# Altium PCB TFT_Adapter_Board_拼版.PcbDoc (part 5 of 9)
Units mm, origin at the board's own origin, x right, y up, seen from the top; angles counter-clockwise.
Board outline 137 x 166.56 mm, 2 copper layers (Top Layer, Bottom Layer); 80 components, 32 nets, 2615 pads, 0 vias.
Unrouted connection lines stored in the file: 1248.
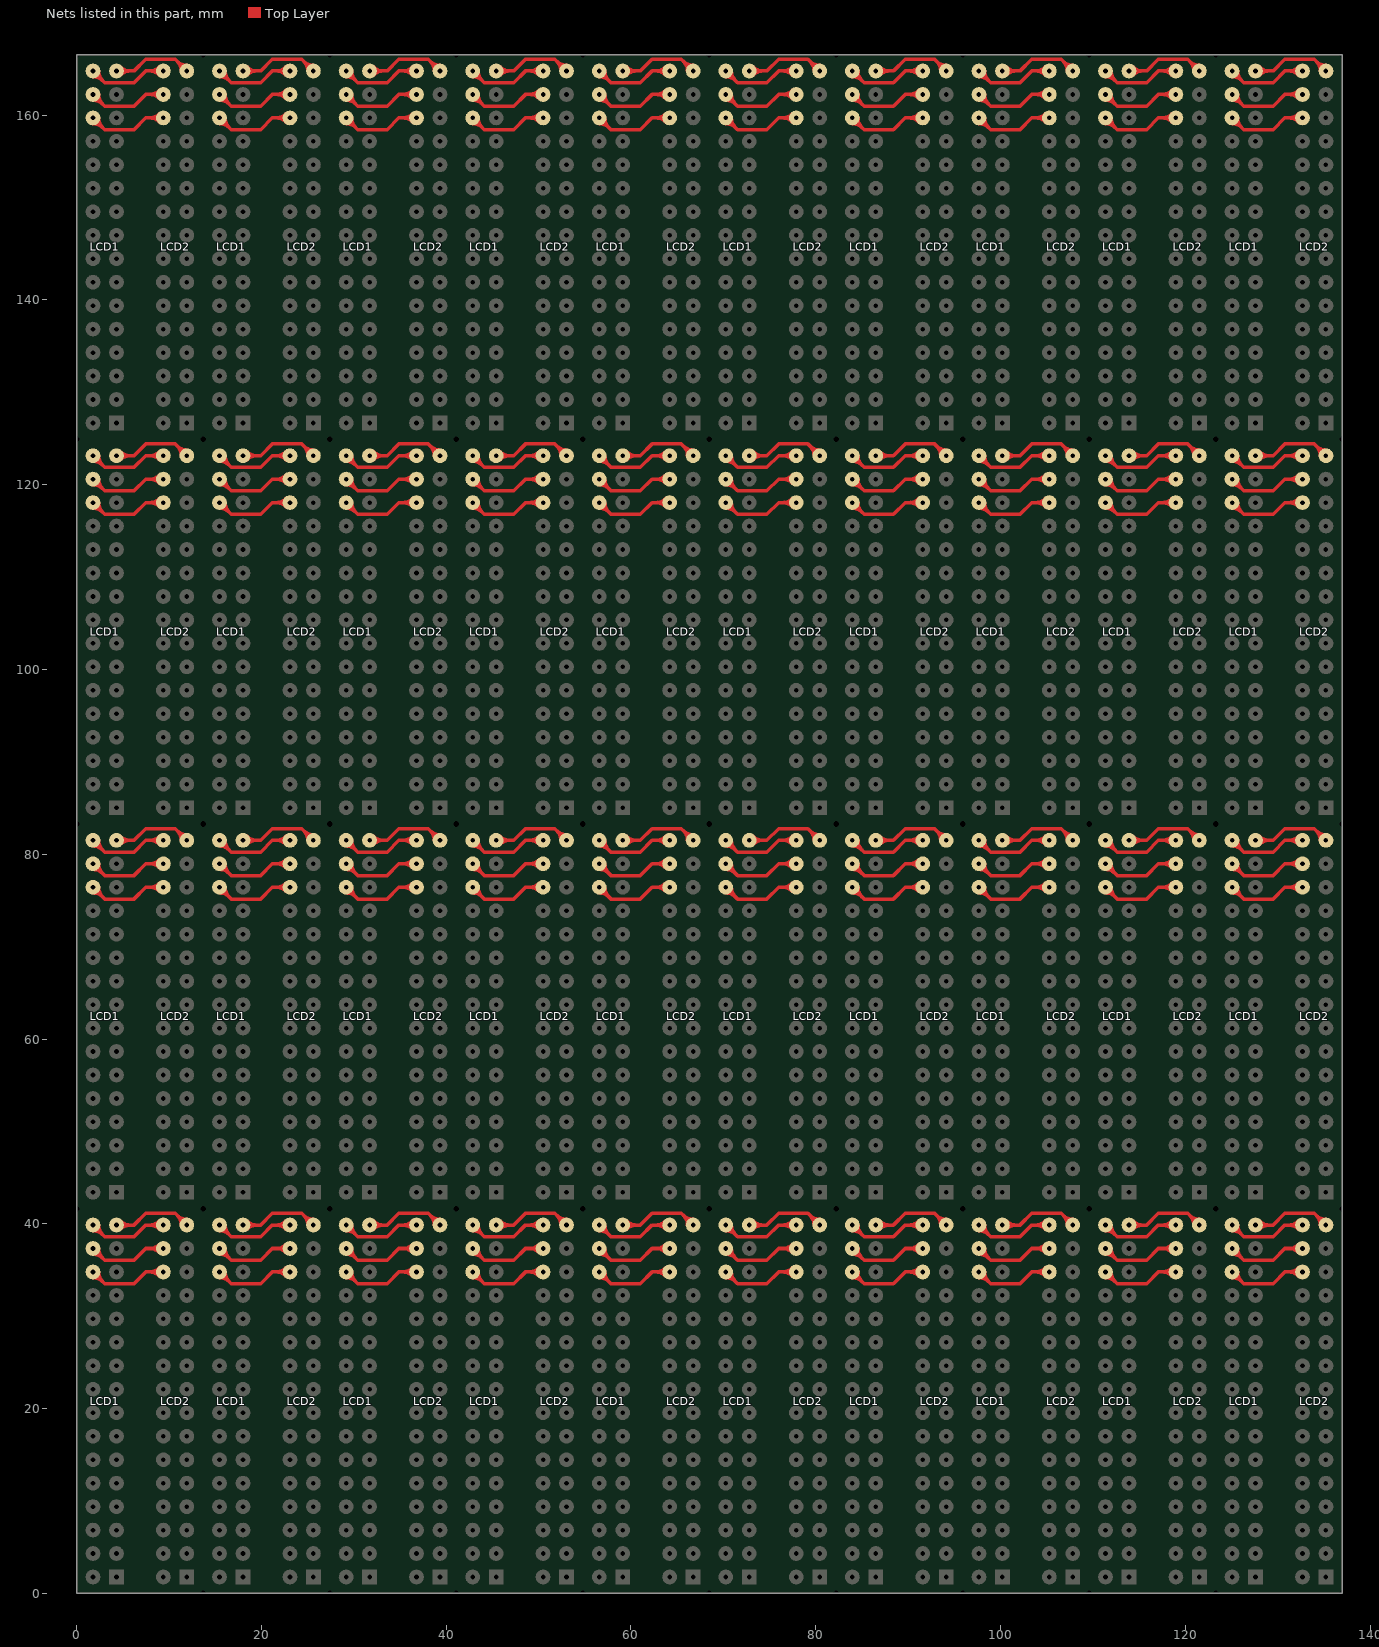
[diagram p5: the nets of this part, all layers, seen from the top]

## Nets (pads, with @x,y where several pads share a name; then routed paths per layer and width w, separated by ;. In a path a pad name is that pad's centre, name@x,y a point inside that pad or via, vN(x,y) a via of type N, cw(c..) or ccw(c..) an arc to the next point about the centre after c; other vN are vias at no path point) (continued)
NetLCD1_16: LCD1.16 LCD2.16 | length 531.8
  Top Layer w0.381: LCD1.16@4.31,39.87 6.215,39.87 7.485,41.14 10.66,41.14 LCD2.16@11.93,39.87 ; LCD1.16@4.31,81.51 6.215,81.51 7.485,82.78 10.66,82.78 LCD2.16@11.93,81.51 ; LCD1.16@4.31,123.15 6.215,123.15 7.485,124.42 10.66,124.42 LCD2.16@11.93,123.15 ; LCD1.16@4.31,164.79 6.215,164.79 7.485,166.06 10.66,166.06 LCD2.16@11.93,164.79 ; LCD1.16@4.741,39.439 cw(c5.781,38.399) 5.781,39.87 cw(c5.781,41.341) LCD1.16@4.741,40.301 ; LCD1.16@4.741,81.079 cw(c5.781,80.039) 5.781,81.51 cw(c5.781,82.981) LCD1.16@4.741,81.941 ; LCD1.16@4.741,122.719 cw(c5.781,121.679) 5.781,123.15 cw(c5.781,124.621) LCD1.16@4.741,123.581 ; LCD1.16@4.741,164.359 cw(c5.781,163.319) 5.781,164.79 cw(c5.781,166.261) LCD1.16@4.741,165.221 ; LCD2.16@11.321,39.87 ccw(c9.849,39.87) 10.89,40.91 ccw(c11.93,41.951) LCD2.16@11.93,40.479 ; LCD2.16@11.321,81.51 ccw(c9.849,81.51) 10.89,82.55 ccw(c11.93,83.591) LCD2.16@11.93,82.119 ; LCD2.16@11.321,123.15 ccw(c9.849,123.15) 10.89,124.19 ccw(c11.93,125.231) LCD2.16@11.93,123.759 ; LCD2.16@11.321,164.79 ccw(c9.849,164.79) 10.89,165.83 ccw(c11.93,166.871) LCD2.16@11.93,165.399 ; LCD1.16@18.01,39.87 19.915,39.87 21.185,41.14 24.36,41.14 LCD2.16@25.63,39.87 ; LCD1.16@18.01,81.51 19.915,81.51 21.185,82.78 24.36,82.78 LCD2.16@25.63,81.51 ; LCD1.16@18.01,123.15 19.915,123.15 21.185,124.42 24.36,124.42 LCD2.16@25.63,123.15 ; LCD1.16@18.01,164.79 19.915,164.79 21.185,166.06 24.36,166.06 LCD2.16@25.63,164.79 ; LCD1.16@18.441,39.439 cw(c19.481,38.399) 19.481,39.87 cw(c19.481,41.341) LCD1.16@18.441,40.301 ; LCD1.16@18.441,81.079 cw(c19.481,80.039) 19.481,81.51 cw(c19.481,82.981) LCD1.16@18.441,81.941 ; LCD1.16@18.441,122.719 cw(c19.481,121.679) 19.481,123.15 cw(c19.481,124.621) LCD1.16@18.441,123.581 ; LCD1.16@18.441,164.359 cw(c19.481,163.319) 19.481,164.79 cw(c19.481,166.261) LCD1.16@18.441,165.221 ; LCD2.16@25.02,39.87 ccw(c23.549,39.87) 24.59,40.91 ccw(c25.63,41.951) LCD2.16@25.63,40.479 ; LCD2.16@25.02,81.51 ccw(c23.549,81.51) 24.59,82.55 ccw(c25.63,83.591) LCD2.16@25.63,82.119 ; LCD2.16@25.02,123.15 ccw(c23.549,123.15) 24.59,124.19 ccw(c25.63,125.231) LCD2.16@25.63,123.759 ; LCD2.16@25.02,164.79 ccw(c23.549,164.79) 24.59,165.83 ccw(c25.63,166.871) LCD2.16@25.63,165.399 ; LCD1.16@31.71,39.87 33.615,39.87 34.885,41.14 38.06,41.14 LCD2.16@39.33,39.87 ; LCD1.16@31.71,81.51 33.615,81.51 34.885,82.78 38.06,82.78 LCD2.16@39.33,81.51 ; LCD1.16@31.71,123.15 33.615,123.15 34.885,124.42 38.06,124.42 LCD2.16@39.33,123.15 ; LCD1.16@31.71,164.79 33.615,164.79 34.885,166.06 38.06,166.06 LCD2.16@39.33,164.79 ; LCD1.16@32.141,39.439 cw(c33.181,38.399) 33.181,39.87 cw(c33.181,41.341) LCD1.16@32.141,40.301 ; LCD1.16@32.141,81.079 cw(c33.181,80.039) 33.181,81.51 cw(c33.181,82.981) LCD1.16@32.141,81.941 ; LCD1.16@32.141,122.719 cw(c33.181,121.679) 33.181,123.15 cw(c33.181,124.621) LCD1.16@32.141,123.581 ; LCD1.16@32.141,164.359 cw(c33.181,163.319) 33.181,164.79 cw(c33.181,166.261) LCD1.16@32.141,165.221 ; LCD2.16@38.72,39.87 ccw(c37.249,39.87) 38.29,40.91 ccw(c39.33,41.951) LCD2.16@39.33,40.479 ; LCD2.16@38.72,81.51 ccw(c37.249,81.51) 38.29,82.55 ccw(c39.33,83.591) LCD2.16@39.33,82.119 ; LCD2.16@38.72,123.15 ccw(c37.249,123.15) 38.29,124.19 ccw(c39.33,125.231) LCD2.16@39.33,123.759 ; LCD2.16@38.72,164.79 ccw(c37.249,164.79) 38.29,165.83 ccw(c39.33,166.871) LCD2.16@39.33,165.399 ; LCD1.16@45.41,39.87 47.315,39.87 48.585,41.14 51.76,41.14 LCD2.16@53.03,39.87 ; LCD1.16@45.41,81.51 47.315,81.51 48.585,82.78 51.76,82.78 LCD2.16@53.03,81.51 ; LCD1.16@45.41,123.15 47.315,123.15 48.585,124.42 51.76,124.42 LCD2.16@53.03,123.15 ; LCD1.16@45.41,164.79 47.315,164.79 48.585,166.06 51.76,166.06 LCD2.16@53.03,164.79 ; LCD1.16@45.841,39.439 cw(c46.881,38.399) 46.881,39.87 cw(c46.881,41.341) LCD1.16@45.841,40.301 ; LCD1.16@45.841,81.079 cw(c46.881,80.039) 46.881,81.51 cw(c46.881,82.981) LCD1.16@45.841,81.941 ; LCD1.16@45.841,122.719 cw(c46.881,121.679) 46.881,123.15 cw(c46.881,124.621) LCD1.16@45.841,123.581 ; LCD1.16@45.841,164.359 cw(c46.881,163.319) 46.881,164.79 cw(c46.881,166.261) LCD1.16@45.841,165.221 ; LCD2.16@52.42,39.87 ccw(c50.949,39.87) 51.99,40.91 ccw(c53.03,41.951) LCD2.16@53.03,40.479 ; LCD2.16@52.42,81.51 ccw(c50.949,81.51) 51.99,82.55 ccw(c53.03,83.591) LCD2.16@53.03,82.119 ; LCD2.16@52.42,123.15 ccw(c50.949,123.15) 51.99,124.19 ccw(c53.03,125.231) LCD2.16@53.03,123.759 ; LCD2.16@52.42,164.79 ccw(c50.949,164.79) 51.99,165.83 ccw(c53.03,166.871) LCD2.16@53.03,165.399 ; LCD1.16@59.11,39.87 61.015,39.87 62.285,41.14 65.46,41.14 LCD2.16@66.73,39.87 ; LCD1.16@59.11,81.51 61.015,81.51 62.285,82.78 65.46,82.78 LCD2.16@66.73,81.51 ; LCD1.16@59.11,123.15 61.015,123.15 62.285,124.42 65.46,124.42 LCD2.16@66.73,123.15 ; LCD1.16@59.11,164.79 61.015,164.79 62.285,166.06 65.46,166.06 LCD2.16@66.73,164.79 ; LCD1.16@59.541,39.439 cw(c60.581,38.399) 60.581,39.87 cw(c60.581,41.341) LCD1.16@59.541,40.301 ; LCD1.16@59.541,81.079 cw(c60.581,80.039) 60.581,81.51 cw(c60.581,82.981) LCD1.16@59.541,81.941 ; LCD1.16@59.541,122.719 cw(c60.581,121.679) 60.581,123.15 cw(c60.581,124.621) LCD1.16@59.541,123.581 ; LCD1.16@59.541,164.359 cw(c60.581,163.319) 60.581,164.79 cw(c60.581,166.261) LCD1.16@59.541,165.221 ; LCD2.16@66.12,39.87 ccw(c64.649,39.87) 65.69,40.91 ccw(c66.73,41.951) LCD2.16@66.73,40.479 ; LCD2.16@66.12,81.51 ccw(c64.649,81.51) 65.69,82.55 ccw(c66.73,83.591) LCD2.16@66.73,82.119 ; LCD2.16@66.12,123.15 ccw(c64.649,123.15) 65.69,124.19 ccw(c66.73,125.231) LCD2.16@66.73,123.759 ; LCD2.16@66.12,164.79 ccw(c64.649,164.79) 65.69,165.83 ccw(c66.73,166.871) LCD2.16@66.73,165.399 ; LCD1.16@72.81,39.87 74.715,39.87 75.985,41.14 79.16,41.14 LCD2.16@80.43,39.87 ; LCD1.16@72.81,81.51 74.715,81.51 75.985,82.78 79.16,82.78 LCD2.16@80.43,81.51 ; LCD1.16@72.81,123.15 74.715,123.15 75.985,124.42 79.16,124.42 LCD2.16@80.43,123.15 ; LCD1.16@72.81,164.79 74.715,164.79 75.985,166.06 79.16,166.06 LCD2.16@80.43,164.79 ; LCD1.16@73.241,39.439 cw(c74.281,38.399) 74.281,39.87 cw(c74.281,41.341) LCD1.16@73.241,40.301 ; LCD1.16@73.241,81.079 cw(c74.281,80.039) 74.281,81.51 cw(c74.281,82.981) LCD1.16@73.241,81.941 ; LCD1.16@73.241,122.719 cw(c74.281,121.679) 74.281,123.15 cw(c74.281,124.621) LCD1.16@73.241,123.581 ; LCD1.16@73.241,164.359 cw(c74.281,163.319) 74.281,164.79 cw(c74.281,166.261) LCD1.16@73.241,165.221 ; LCD2.16@79.82,39.87 ccw(c78.349,39.87) 79.39,40.91 ccw(c80.43,41.951) LCD2.16@80.43,40.479 ; LCD2.16@79.82,81.51 ccw(c78.349,81.51) 79.39,82.55 ccw(c80.43,83.591) LCD2.16@80.43,82.119 ; LCD2.16@79.82,123.15 ccw(c78.349,123.15) 79.39,124.19 ccw(c80.43,125.231) LCD2.16@80.43,123.759 ; LCD2.16@79.82,164.79 ccw(c78.349,164.79) 79.39,165.83 ccw(c80.43,166.871) LCD2.16@80.43,165.399 ; LCD1.16@86.51,39.87 88.415,39.87 89.685,41.14 92.86,41.14 LCD2.16@94.13,39.87 ; LCD1.16@86.51,81.51 88.415,81.51 89.685,82.78 92.86,82.78 LCD2.16@94.13,81.51 ; LCD1.16@86.51,123.15 88.415,123.15 89.685,124.42 92.86,124.42 LCD2.16@94.13,123.15 ; LCD1.16@86.51,164.79 88.415,164.79 89.685,166.06 92.86,166.06 LCD2.16@94.13,164.79 ; LCD1.16@86.941,39.439 cw(c87.981,38.399) 87.981,39.87 cw(c87.981,41.341) LCD1.16@86.941,40.301 ; LCD1.16@86.941,81.079 cw(c87.981,80.039) 87.981,81.51 cw(c87.981,82.981) LCD1.16@86.941,81.941 ; LCD1.16@86.941,122.719 cw(c87.981,121.679) 87.981,123.15 cw(c87.981,124.621) LCD1.16@86.941,123.581 ; LCD1.16@86.941,164.359 cw(c87.981,163.319) 87.981,164.79 cw(c87.981,166.261) LCD1.16@86.941,165.221 ; LCD2.16@93.52,39.87 ccw(c92.049,39.87) 93.09,40.91 ccw(c94.13,41.951) LCD2.16@94.13,40.479 ; LCD2.16@93.52,81.51 ccw(c92.049,81.51) 93.09,82.55 ccw(c94.13,83.591) LCD2.16@94.13,82.119 ; LCD2.16@93.52,123.15 ccw(c92.049,123.15) 93.09,124.19 ccw(c94.13,125.231) LCD2.16@94.13,123.759 ; LCD2.16@93.52,164.79 ccw(c92.049,164.79) 93.09,165.83 ccw(c94.13,166.871) LCD2.16@94.13,165.399 ; LCD1.16@100.21,39.87 102.115,39.87 103.385,41.14 106.56,41.14 LCD2.16@107.83,39.87 ; LCD1.16@100.21,81.51 102.115,81.51 103.385,82.78 106.56,82.78 LCD2.16@107.83,81.51 ; LCD1.16@100.21,123.15 102.115,123.15 103.385,124.42 106.56,124.42 LCD2.16@107.83,123.15 ; LCD1.16@100.21,164.79 102.115,164.79 103.385,166.06 106.56,166.06 LCD2.16@107.83,164.79 ; LCD1.16@100.641,39.439 cw(c101.681,38.399) 101.681,39.87 cw(c101.681,41.341) LCD1.16@100.641,40.301 ; LCD1.16@100.641,81.079 cw(c101.681,80.039) 101.681,81.51 cw(c101.681,82.981) LCD1.16@100.641,81.941 ; LCD1.16@100.641,122.719 cw(c101.681,121.679) 101.681,123.15 cw(c101.681,124.621) LCD1.16@100.641,123.581 ; LCD1.16@100.641,164.359 cw(c101.681,163.319) 101.681,164.79 cw(c101.681,166.261) LCD1.16@100.641,165.221 ; LCD2.16@107.22,39.87 ccw(c105.749,39.87) 106.79,40.91 ccw(c107.83,41.951) LCD2.16@107.83,40.479 ; LCD2.16@107.22,81.51 ccw(c105.749,81.51) 106.79,82.55 ccw(c107.83,83.591) LCD2.16@107.83,82.119 ; LCD2.16@107.22,123.15 ccw(c105.749,123.15) 106.79,124.19 ccw(c107.83,125.231) LCD2.16@107.83,123.759 ; LCD2.16@107.22,164.79 ccw(c105.749,164.79) 106.79,165.83 ccw(c107.83,166.871) LCD2.16@107.83,165.399 ; LCD1.16@113.91,39.87 115.815,39.87 117.085,41.14 120.26,41.14 LCD2.16@121.53,39.87 ; LCD1.16@113.91,81.51 115.815,81.51 117.085,82.78 120.26,82.78 LCD2.16@121.53,81.51 ; LCD1.16@113.91,123.15 115.815,123.15 117.085,124.42 120.26,124.42 LCD2.16@121.53,123.15 ; LCD1.16@113.91,164.79 115.815,164.79 117.085,166.06 120.26,166.06 LCD2.16@121.53,164.79 ; LCD1.16@114.341,39.439 cw(c115.381,38.399) 115.381,39.87 cw(c115.381,41.341) LCD1.16@114.341,40.301 ; LCD1.16@114.341,81.079 cw(c115.381,80.039) 115.381,81.51 cw(c115.381,82.981) LCD1.16@114.341,81.941 ; LCD1.16@114.341,122.719 cw(c115.381,121.679) 115.381,123.15 cw(c115.381,124.621) LCD1.16@114.341,123.581 ; LCD1.16@114.341,164.359 cw(c115.381,163.319) 115.381,164.79 cw(c115.381,166.261) LCD1.16@114.341,165.221 ; LCD2.16@120.92,39.87 ccw(c119.449,39.87) 120.49,40.91 ccw(c121.53,41.951) LCD2.16@121.53,40.479 ; LCD2.16@120.92,81.51 ccw(c119.449,81.51) 120.49,82.55 ccw(c121.53,83.591) LCD2.16@121.53,82.119 ; LCD2.16@120.92,123.15 ccw(c119.449,123.15) 120.49,124.19 ccw(c121.53,125.231) LCD2.16@121.53,123.759 ; LCD2.16@120.92,164.79 ccw(c119.449,164.79) 120.49,165.83 ccw(c121.53,166.871) LCD2.16@121.53,165.399 ; LCD1.16@127.61,39.87 129.515,39.87 130.785,41.14 133.96,41.14 LCD2.16@135.23,39.87 ; LCD1.16@127.61,81.51 129.515,81.51 130.785,82.78 133.96,82.78 LCD2.16@135.23,81.51 ; LCD1.16@127.61,123.15 129.515,123.15 130.785,124.42 133.96,124.42 LCD2.16@135.23,123.15 ; LCD1.16@127.61,164.79 129.515,164.79 130.785,166.06 133.96,166.06 LCD2.16@135.23,164.79 ; LCD1.16@128.041,39.439 cw(c129.081,38.399) 129.081,39.87 cw(c129.081,41.341) LCD1.16@128.041,40.301 ; LCD1.16@128.041,81.079 cw(c129.081,80.039) 129.081,81.51 cw(c129.081,82.981) LCD1.16@128.041,81.941 ; LCD1.16@128.041,122.719 cw(c129.081,121.679) 129.081,123.15 cw(c129.081,124.621) LCD1.16@128.041,123.581 ; LCD1.16@128.041,164.359 cw(c129.081,163.319) 129.081,164.79 cw(c129.081,166.261) LCD1.16@128.041,165.221 ; LCD2.16@134.62,39.87 ccw(c133.149,39.87) 134.19,40.91 ccw(c135.23,41.951) LCD2.16@135.23,40.479 ; LCD2.16@134.62,81.51 ccw(c133.149,81.51) 134.19,82.55 ccw(c135.23,83.591) LCD2.16@135.23,82.119 ; LCD2.16@134.62,123.15 ccw(c133.149,123.15) 134.19,124.19 ccw(c135.23,125.231) LCD2.16@135.23,123.759 ; LCD2.16@134.62,164.79 ccw(c133.149,164.79) 134.19,165.83 ccw(c135.23,166.871) LCD2.16@135.23,165.399
NetLCD1_17: LCD1.17 LCD2.17 | length 531.8
  Top Layer w0.381: LCD1.17@1.77,39.261 cw(c1.77,37.789) 2.81,38.83 cw(c3.851,39.87) LCD1.17@2.379,39.87 ; LCD1.17@1.77,39.87 3.04,38.6 6.215,38.6 7.485,39.87 LCD2.17@9.39,39.87 ; LCD1.17@1.77,80.9 cw(c1.77,79.429) 2.81,80.47 cw(c3.851,81.51) LCD1.17@2.379,81.51 ; LCD1.17@1.77,81.51 3.04,80.24 6.215,80.24 7.485,81.51 LCD2.17@9.39,81.51 ; LCD1.17@1.77,122.54 cw(c1.77,121.069) 2.81,122.11 cw(c3.851,123.15) LCD1.17@2.379,123.15 ; LCD1.17@1.77,123.15 3.04,121.88 6.215,121.88 7.485,123.15 LCD2.17@9.39,123.15 ; LCD1.17@1.77,164.18 cw(c1.77,162.709) 2.81,163.75 cw(c3.851,164.79) LCD1.17@2.379,164.79 ; LCD1.17@1.77,164.79 3.04,163.52 6.215,163.52 7.485,164.79 LCD2.17@9.39,164.79 ; LCD2.17@8.959,39.439 ccw(c7.919,38.399) 7.919,39.87 ccw(c7.919,41.341) LCD2.17@8.959,40.301 ; LCD2.17@8.959,81.079 ccw(c7.919,80.039) 7.919,81.51 ccw(c7.919,82.981) LCD2.17@8.959,81.941 ; LCD2.17@8.959,122.719 ccw(c7.919,121.679) 7.919,123.15 ccw(c7.919,124.621) LCD2.17@8.959,123.581 ; LCD2.17@8.959,164.359 ccw(c7.919,163.319) 7.919,164.79 ccw(c7.919,166.261) LCD2.17@8.959,165.221 ; LCD1.17@15.47,39.261 cw(c15.47,37.789) 16.51,38.83 cw(c17.551,39.87) LCD1.17@16.079,39.87 ; LCD1.17@15.47,39.87 16.74,38.6 19.915,38.6 21.185,39.87 LCD2.17@23.09,39.87 ; LCD1.17@15.47,80.9 cw(c15.47,79.429) 16.51,80.47 cw(c17.551,81.51) LCD1.17@16.079,81.51 ; LCD1.17@15.47,81.51 16.74,80.24 19.915,80.24 21.185,81.51 LCD2.17@23.09,81.51 ; LCD1.17@15.47,122.54 cw(c15.47,121.069) 16.51,122.11 cw(c17.551,123.15) LCD1.17@16.079,123.15 ; LCD1.17@15.47,123.15 16.74,121.88 19.915,121.88 21.185,123.15 LCD2.17@23.09,123.15 ; LCD1.17@15.47,164.18 cw(c15.47,162.709) 16.51,163.75 cw(c17.551,164.79) LCD1.17@16.079,164.79 ; LCD1.17@15.47,164.79 16.74,163.52 19.915,163.52 21.185,164.79 LCD2.17@23.09,164.79 ; LCD2.17@22.659,39.439 ccw(c21.619,38.399) 21.619,39.87 ccw(c21.619,41.341) LCD2.17@22.659,40.301 ; LCD2.17@22.659,81.079 ccw(c21.619,80.039) 21.619,81.51 ccw(c21.619,82.981) LCD2.17@22.659,81.941 ; LCD2.17@22.659,122.719 ccw(c21.619,121.679) 21.619,123.15 ccw(c21.619,124.621) LCD2.17@22.659,123.581 ; LCD2.17@22.659,164.359 ccw(c21.619,163.319) 21.619,164.79 ccw(c21.619,166.261) LCD2.17@22.659,165.221 ; LCD1.17@29.17,39.261 cw(c29.17,37.789) 30.21,38.83 cw(c31.251,39.87) LCD1.17@29.779,39.87 ; LCD1.17@29.17,39.87 30.44,38.6 33.615,38.6 34.885,39.87 LCD2.17@36.79,39.87 ; LCD1.17@29.17,80.9 cw(c29.17,79.429) 30.21,80.47 cw(c31.251,81.51) LCD1.17@29.779,81.51 ; LCD1.17@29.17,81.51 30.44,80.24 33.615,80.24 34.885,81.51 LCD2.17@36.79,81.51 ; LCD1.17@29.17,122.54 cw(c29.17,121.069) 30.21,122.11 cw(c31.251,123.15) LCD1.17@29.779,123.15 ; LCD1.17@29.17,123.15 30.44,121.88 33.615,121.88 34.885,123.15 LCD2.17@36.79,123.15 ; LCD1.17@29.17,164.18 cw(c29.17,162.709) 30.21,163.75 cw(c31.251,164.79) LCD1.17@29.779,164.79 ; LCD1.17@29.17,164.79 30.44,163.52 33.615,163.52 34.885,164.79 LCD2.17@36.79,164.79 ; LCD2.17@36.359,39.439 ccw(c35.319,38.399) 35.319,39.87 ccw(c35.319,41.341) LCD2.17@36.359,40.301 ; LCD2.17@36.359,81.079 ccw(c35.319,80.039) 35.319,81.51 ccw(c35.319,82.981) LCD2.17@36.359,81.941 ; LCD2.17@36.359,122.719 ccw(c35.319,121.679) 35.319,123.15 ccw(c35.319,124.621) LCD2.17@36.359,123.581 ; LCD2.17@36.359,164.359 ccw(c35.319,163.319) 35.319,164.79 ccw(c35.319,166.261) LCD2.17@36.359,165.221 ; LCD1.17@42.87,39.261 cw(c42.87,37.789) 43.91,38.83 cw(c44.951,39.87) LCD1.17@43.479,39.87 ; LCD1.17@42.87,39.87 44.14,38.6 47.315,38.6 48.585,39.87 LCD2.17@50.49,39.87 ; LCD1.17@42.87,80.9 cw(c42.87,79.429) 43.91,80.47 cw(c44.951,81.51) LCD1.17@43.479,81.51 ; LCD1.17@42.87,81.51 44.14,80.24 47.315,80.24 48.585,81.51 LCD2.17@50.49,81.51 ; LCD1.17@42.87,122.54 cw(c42.87,121.069) 43.91,122.11 cw(c44.951,123.15) LCD1.17@43.479,123.15 ; LCD1.17@42.87,123.15 44.14,121.88 47.315,121.88 48.585,123.15 LCD2.17@50.49,123.15 ; LCD1.17@42.87,164.18 cw(c42.87,162.709) 43.91,163.75 cw(c44.951,164.79) LCD1.17@43.479,164.79 ; LCD1.17@42.87,164.79 44.14,163.52 47.315,163.52 48.585,164.79 LCD2.17@50.49,164.79 ; LCD2.17@50.059,39.439 ccw(c49.019,38.399) 49.019,39.87 ccw(c49.019,41.341) LCD2.17@50.059,40.301 ; LCD2.17@50.059,81.079 ccw(c49.019,80.039) 49.019,81.51 ccw(c49.019,82.981) LCD2.17@50.059,81.941 ; LCD2.17@50.059,122.719 ccw(c49.019,121.679) 49.019,123.15 ccw(c49.019,124.621) LCD2.17@50.059,123.581 ; LCD2.17@50.059,164.359 ccw(c49.019,163.319) 49.019,164.79 ccw(c49.019,166.261) LCD2.17@50.059,165.221 ; LCD1.17@56.57,39.261 cw(c56.57,37.789) 57.61,38.83 cw(c58.651,39.87) LCD1.17@57.179,39.87 ; LCD1.17@56.57,39.87 57.84,38.6 61.015,38.6 62.285,39.87 LCD2.17@64.19,39.87 ; LCD1.17@56.57,80.9 cw(c56.57,79.429) 57.61,80.47 cw(c58.651,81.51) LCD1.17@57.179,81.51 ; LCD1.17@56.57,81.51 57.84,80.24 61.015,80.24 62.285,81.51 LCD2.17@64.19,81.51 ; LCD1.17@56.57,122.54 cw(c56.57,121.069) 57.61,122.11 cw(c58.651,123.15) LCD1.17@57.179,123.15 ; LCD1.17@56.57,123.15 57.84,121.88 61.015,121.88 62.285,123.15 LCD2.17@64.19,123.15 ; LCD1.17@56.57,164.18 cw(c56.57,162.709) 57.61,163.75 cw(c58.651,164.79) LCD1.17@57.179,164.79 ; LCD1.17@56.57,164.79 57.84,163.52 61.015,163.52 62.285,164.79 LCD2.17@64.19,164.79 ; LCD2.17@63.759,39.439 ccw(c62.719,38.399) 62.719,39.87 ccw(c62.719,41.341) LCD2.17@63.759,40.301 ; LCD2.17@63.759,81.079 ccw(c62.719,80.039) 62.719,81.51 ccw(c62.719,82.981) LCD2.17@63.759,81.941 ; LCD2.17@63.759,122.719 ccw(c62.719,121.679) 62.719,123.15 ccw(c62.719,124.621) LCD2.17@63.759,123.581 ; LCD2.17@63.759,164.359 ccw(c62.719,163.319) 62.719,164.79 ccw(c62.719,166.261) LCD2.17@63.759,165.221 ; LCD1.17@70.27,39.261 cw(c70.27,37.789) 71.31,38.83 cw(c72.351,39.87) LCD1.17@70.879,39.87 ; LCD1.17@70.27,39.87 71.54,38.6 74.715,38.6 75.985,39.87 LCD2.17@77.89,39.87 ; LCD1.17@70.27,80.9 cw(c70.27,79.429) 71.31,80.47 cw(c72.351,81.51) LCD1.17@70.879,81.51 ; LCD1.17@70.27,81.51 71.54,80.24 74.715,80.24 75.985,81.51 LCD2.17@77.89,81.51 ; LCD1.17@70.27,122.54 cw(c70.27,121.069) 71.31,122.11 cw(c72.351,123.15) LCD1.17@70.879,123.15 ; LCD1.17@70.27,123.15 71.54,121.88 74.715,121.88 75.985,123.15 LCD2.17@77.89,123.15 ; LCD1.17@70.27,164.18 cw(c70.27,162.709) 71.31,163.75 cw(c72.351,164.79) LCD1.17@70.879,164.79 ; LCD1.17@70.27,164.79 71.54,163.52 74.715,163.52 75.985,164.79 LCD2.17@77.89,164.79 ; LCD2.17@77.459,39.439 ccw(c76.419,38.399) 76.419,39.87 ccw(c76.419,41.341) LCD2.17@77.459,40.301 ; LCD2.17@77.459,81.079 ccw(c76.419,80.039) 76.419,81.51 ccw(c76.419,82.981) LCD2.17@77.459,81.941 ; LCD2.17@77.459,122.719 ccw(c76.419,121.679) 76.419,123.15 ccw(c76.419,124.621) LCD2.17@77.459,123.581 ; LCD2.17@77.459,164.359 ccw(c76.419,163.319) 76.419,164.79 ccw(c76.419,166.261) LCD2.17@77.459,165.221 ; LCD1.17@83.97,39.261 cw(c83.97,37.789) 85.01,38.83 cw(c86.051,39.87) LCD1.17@84.579,39.87 ; LCD1.17@83.97,39.87 85.24,38.6 88.415,38.6 89.685,39.87 LCD2.17@91.59,39.87 ; LCD1.17@83.97,80.9 cw(c83.97,79.429) 85.01,80.47 cw(c86.051,81.51) LCD1.17@84.579,81.51 ; LCD1.17@83.97,81.51 85.24,80.24 88.415,80.24 89.685,81.51 LCD2.17@91.59,81.51 ; LCD1.17@83.97,122.54 cw(c83.97,121.069) 85.01,122.11 cw(c86.051,123.15) LCD1.17@84.579,123.15 ; LCD1.17@83.97,123.15 85.24,121.88 88.415,121.88 89.685,123.15 LCD2.17@91.59,123.15 ; LCD1.17@83.97,164.18 cw(c83.97,162.709) 85.01,163.75 cw(c86.051,164.79) LCD1.17@84.579,164.79 ; LCD1.17@83.97,164.79 85.24,163.52 88.415,163.52 89.685,164.79 LCD2.17@91.59,164.79 ; LCD2.17@91.159,39.439 ccw(c90.119,38.399) 90.119,39.87 ccw(c90.119,41.341) LCD2.17@91.159,40.301 ; LCD2.17@91.159,81.079 ccw(c90.119,80.039) 90.119,81.51 ccw(c90.119,82.981) LCD2.17@91.159,81.941 ; LCD2.17@91.159,122.719 ccw(c90.119,121.679) 90.119,123.15 ccw(c90.119,124.621) LCD2.17@91.159,123.581 ; LCD2.17@91.159,164.359 ccw(c90.119,163.319) 90.119,164.79 ccw(c90.119,166.261) LCD2.17@91.159,165.221 ; LCD1.17@97.67,39.261 cw(c97.67,37.789) 98.71,38.83 cw(c99.751,39.87) LCD1.17@98.279,39.87 ; LCD1.17@97.67,39.87 98.94,38.6 102.115,38.6 103.385,39.87 LCD2.17@105.29,39.87 ; LCD1.17@97.67,80.9 cw(c97.67,79.429) 98.71,80.47 cw(c99.751,81.51) LCD1.17@98.279,81.51 ; LCD1.17@97.67,81.51 98.94,80.24 102.115,80.24 103.385,81.51 LCD2.17@105.29,81.51 ; LCD1.17@97.67,122.54 cw(c97.67,121.069) 98.71,122.11 cw(c99.751,123.15) LCD1.17@98.279,123.15 ; LCD1.17@97.67,123.15 98.94,121.88 102.115,121.88 103.385,123.15 LCD2.17@105.29,123.15 ; LCD1.17@97.67,164.18 cw(c97.67,162.709) 98.71,163.75 cw(c99.751,164.79) LCD1.17@98.279,164.79 ; LCD1.17@97.67,164.79 98.94,163.52 102.115,163.52 103.385,164.79 LCD2.17@105.29,164.79 ; LCD2.17@104.859,39.439 ccw(c103.819,38.399) 103.819,39.87 ccw(c103.819,41.341) LCD2.17@104.859,40.301 ; LCD2.17@104.859,81.079 ccw(c103.819,80.039) 103.819,81.51 ccw(c103.819,82.981) LCD2.17@104.859,81.941 ; LCD2.17@104.859,122.719 ccw(c103.819,121.679) 103.819,123.15 ccw(c103.819,124.621) LCD2.17@104.859,123.581 ; LCD2.17@104.859,164.359 ccw(c103.819,163.319) 103.819,164.79 ccw(c103.819,166.261) LCD2.17@104.859,165.221 ; LCD1.17@111.37,39.261 cw(c111.37,37.789) 112.41,38.83 cw(c113.451,39.87) LCD1.17@111.979,39.87 ; LCD1.17@111.37,39.87 112.64,38.6 115.815,38.6 117.085,39.87 LCD2.17@118.99,39.87 ; LCD1.17@111.37,80.9 cw(c111.37,79.429) 112.41,80.47 cw(c113.451,81.51) LCD1.17@111.979,81.51 ; LCD1.17@111.37,81.51 112.64,80.24 115.815,80.24 117.085,81.51 LCD2.17@118.99,81.51 ; LCD1.17@111.37,122.54 cw(c111.37,121.069) 112.41,122.11 cw(c113.451,123.15) LCD1.17@111.979,123.15 ; LCD1.17@111.37,123.15 112.64,121.88 115.815,121.88 117.085,123.15 LCD2.17@118.99,123.15 ; LCD1.17@111.37,164.18 cw(c111.37,162.709) 112.41,163.75 cw(c113.451,164.79) LCD1.17@111.979,164.79 ; LCD1.17@111.37,164.79 112.64,163.52 115.815,163.52 117.085,164.79 LCD2.17@118.99,164.79 ; LCD2.17@118.559,39.439 ccw(c117.519,38.399) 117.519,39.87 ccw(c117.519,41.341) LCD2.17@118.559,40.301 ; LCD2.17@118.559,81.079 ccw(c117.519,80.039) 117.519,81.51 ccw(c117.519,82.981) LCD2.17@118.559,81.941 ; LCD2.17@118.559,122.719 ccw(c117.519,121.679) 117.519,123.15 ccw(c117.519,124.621) LCD2.17@118.559,123.581 ; LCD2.17@118.559,164.359 ccw(c117.519,163.319) 117.519,164.79 ccw(c117.519,166.261) LCD2.17@118.559,165.221 ; LCD1.17@125.07,39.261 cw(c125.07,37.789) 126.11,38.83 cw(c127.151,39.87) LCD1.17@125.679,39.87 ; LCD1.17@125.07,39.87 126.34,38.6 129.515,38.6 130.785,39.87 LCD2.17@132.69,39.87 ; LCD1.17@125.07,80.9 cw(c125.07,79.429) 126.11,80.47 cw(c127.151,81.51) LCD1.17@125.679,81.51 ; LCD1.17@125.07,81.51 126.34,80.24 129.515,80.24 130.785,81.51 LCD2.17@132.69,81.51 ; LCD1.17@125.07,122.54 cw(c125.07,121.069) 126.11,122.11 cw(c127.151,123.15) LCD1.17@125.679,123.15 ; LCD1.17@125.07,123.15 126.34,121.88 129.515,121.88 130.785,123.15 LCD2.17@132.69,123.15 ; LCD1.17@125.07,164.18 cw(c125.07,162.709) 126.11,163.75 cw(c127.151,164.79) LCD1.17@125.679,164.79 ; LCD1.17@125.07,164.79 126.34,163.52 129.515,163.52 130.785,164.79 LCD2.17@132.69,164.79 ; LCD2.17@132.259,39.439 ccw(c131.219,38.399) 131.219,39.87 ccw(c131.219,41.341) LCD2.17@132.259,40.301 ; LCD2.17@132.259,81.079 ccw(c131.219,80.039) 131.219,81.51 ccw(c131.219,82.981) LCD2.17@132.259,81.941 ; LCD2.17@132.259,122.719 ccw(c131.219,121.679) 131.219,123.15 ccw(c131.219,124.621) LCD2.17@132.259,123.581 ; LCD2.17@132.259,164.359 ccw(c131.219,163.319) 131.219,164.79 ccw(c131.219,166.261) LCD2.17@132.259,165.221
NetLCD1_18: LCD1.18 LCD2.18 | length 531.8
  Top Layer w0.381: LCD1.18@1.77,36.721 cw(c1.77,35.249) 2.81,36.29 cw(c3.851,37.33) LCD1.18@2.379,37.33 ; LCD1.18@1.77,37.33 3.04,36.06 6.215,36.06 7.485,37.33 LCD2.18@9.39,37.33 ; LCD1.18@1.77,78.36 cw(c1.77,76.889) 2.81,77.93 cw(c3.851,78.97) LCD1.18@2.379,78.97 ; LCD1.18@1.77,78.97 3.04,77.7 6.215,77.7 7.485,78.97 LCD2.18@9.39,78.97 ; LCD1.18@1.77,120 cw(c1.77,118.529) 2.81,119.57 cw(c3.851,120.61) LCD1.18@2.379,120.61 ; LCD1.18@1.77,120.61 3.04,119.34 6.215,119.34 7.485,120.61 LCD2.18@9.39,120.61 ; LCD1.18@1.77,161.64 cw(c1.77,160.169) 2.81,161.21 cw(c3.851,162.25) LCD1.18@2.379,162.25 ; LCD1.18@1.77,162.25 3.04,160.98 6.215,160.98 7.485,162.25 LCD2.18@9.39,162.25 ; LCD2.18@8.959,36.899 ccw(c7.919,35.859) 7.919,37.33 ccw(c7.919,38.801) LCD2.18@8.959,37.761 ; LCD2.18@8.959,78.539 ccw(c7.919,77.499) 7.919,78.97 ccw(c7.919,80.441) LCD2.18@8.959,79.401 ; LCD2.18@8.959,120.179 ccw(c7.919,119.139) 7.919,120.61 ccw(c7.919,122.081) LCD2.18@8.959,121.041 ; LCD2.18@8.959,161.819 ccw(c7.919,160.779) 7.919,162.25 ccw(c7.919,163.721) LCD2.18@8.959,162.681 ; LCD1.18@15.47,36.721 cw(c15.47,35.249) 16.51,36.29 cw(c17.551,37.33) LCD1.18@16.079,37.33 ; LCD1.18@15.47,37.33 16.74,36.06 19.915,36.06 21.185,37.33 LCD2.18@23.09,37.33 ; LCD1.18@15.47,78.36 cw(c15.47,76.889) 16.51,77.93 cw(c17.551,78.97) LCD1.18@16.079,78.97 ; LCD1.18@15.47,78.97 16.74,77.7 19.915,77.7 21.185,78.97 LCD2.18@23.09,78.97 ; LCD1.18@15.47,120 cw(c15.47,118.529) 16.51,119.57 cw(c17.551,120.61) LCD1.18@16.079,120.61 ; LCD1.18@15.47,120.61 16.74,119.34 19.915,119.34 21.185,120.61 LCD2.18@23.09,120.61 ; LCD1.18@15.47,161.64 cw(c15.47,160.169) 16.51,161.21 cw(c17.551,162.25) LCD1.18@16.079,162.25 ; LCD1.18@15.47,162.25 16.74,160.98 19.915,160.98 21.185,162.25 LCD2.18@23.09,162.25 ; LCD2.18@22.659,36.899 ccw(c21.619,35.859) 21.619,37.33 ccw(c21.619,38.801) LCD2.18@22.659,37.761 ; LCD2.18@22.659,78.539 ccw(c21.619,77.499) 21.619,78.97 ccw(c21.619,80.441) LCD2.18@22.659,79.401 ; LCD2.18@22.659,120.179 ccw(c21.619,119.139) 21.619,120.61 ccw(c21.619,122.081) LCD2.18@22.659,121.041 ; LCD2.18@22.659,161.819 ccw(c21.619,160.779) 21.619,162.25 ccw(c21.619,163.721) LCD2.18@22.659,162.681 ; LCD1.18@29.17,36.721 cw(c29.17,35.249) 30.21,36.29 cw(c31.251,37.33) LCD1.18@29.779,37.33 ; LCD1.18@29.17,37.33 30.44,36.06 33.615,36.06 34.885,37.33 LCD2.18@36.79,37.33 ; LCD1.18@29.17,78.36 cw(c29.17,76.889) 30.21,77.93 cw(c31.251,78.97) LCD1.18@29.779,78.97 ; LCD1.18@29.17,78.97 30.44,77.7 33.615,77.7 34.885,78.97 LCD2.18@36.79,78.97 ; LCD1.18@29.17,120 cw(c29.17,118.529) 30.21,119.57 cw(c31.251,120.61) LCD1.18@29.779,120.61 ; LCD1.18@29.17,120.61 30.44,119.34 33.615,119.34 34.885,120.61 LCD2.18@36.79,120.61 ; LCD1.18@29.17,161.64 cw(c29.17,160.169) 30.21,161.21 cw(c31.251,162.25) LCD1.18@29.779,162.25 ; LCD1.18@29.17,162.25 30.44,160.98 33.615,160.98 34.885,162.25 LCD2.18@36.79,162.25 ; LCD2.18@36.359,36.899 ccw(c35.319,35.859) 35.319,37.33 ccw(c35.319,38.801) LCD2.18@36.359,37.761 ; LCD2.18@36.359,78.539 ccw(c35.319,77.499) 35.319,78.97 ccw(c35.319,80.441) LCD2.18@36.359,79.401 ; LCD2.18@36.359,120.179 ccw(c35.319,119.139) 35.319,120.61 ccw(c35.319,122.081) LCD2.18@36.359,121.041 ; LCD2.18@36.359,161.819 ccw(c35.319,160.779) 35.319,162.25 ccw(c35.319,163.721) LCD2.18@36.359,162.681 ; LCD1.18@42.87,36.721 cw(c42.87,35.249) 43.91,36.29 cw(c44.951,37.33) LCD1.18@43.479,37.33 ; LCD1.18@42.87,37.33 44.14,36.06 47.315,36.06 48.585,37.33 LCD2.18@50.49,37.33 ; LCD1.18@42.87,78.36 cw(c42.87,76.889) 43.91,77.93 cw(c44.951,78.97) LCD1.18@43.479,78.97 ; LCD1.18@42.87,78.97 44.14,77.7 47.315,77.7 48.585,78.97 LCD2.18@50.49,78.97 ; LCD1.18@42.87,120 cw(c42.87,118.529) 43.91,119.57 cw(c44.951,120.61) LCD1.18@43.479,120.61 ; LCD1.18@42.87,120.61 44.14,119.34 47.315,119.34 48.585,120.61 LCD2.18@50.49,120.61 ; LCD1.18@42.87,161.64 cw(c42.87,160.169) 43.91,161.21 cw(c44.951,162.25) LCD1.18@43.479,162.25 ; LCD1.18@42.87,162.25 44.14,160.98 47.315,160.98 48.585,162.25 LCD2.18@50.49,162.25 ; LCD2.18@50.059,36.899 ccw(c49.019,35.859) 49.019,37.33 ccw(c49.019,38.801) LCD2.18@50.059,37.761 ; LCD2.18@50.059,78.539 ccw(c49.019,77.499) 49.019,78.97 ccw(c49.019,80.441) LCD2.18@50.059,79.401 ; LCD2.18@50.059,120.179 ccw(c49.019,119.139) 49.019,120.61 ccw(c49.019,122.081) LCD2.18@50.059,121.041 ; LCD2.18@50.059,161.819 ccw(c49.019,160.779) 49.019,162.25 ccw(c49.019,163.721) LCD2.18@50.059,162.681 ; LCD1.18@56.57,36.721 cw(c56.57,35.249) 57.61,36.29 cw(c58.651,37.33) LCD1.18@57.179,37.33 ; LCD1.18@56.57,37.33 57.84,36.06 61.015,36.06 62.285,37.33 LCD2.18@64.19,37.33 ; LCD1.18@56.57,78.36 cw(c56.57,76.889) 57.61,77.93 cw(c58.651,78.97) LCD1.18@57.179,78.97 ; LCD1.18@56.57,78.97 57.84,77.7 61.015,77.7 62.285,78.97 LCD2.18@64.19,78.97 ; LCD1.18@56.57,120 cw(c56.57,118.529) 57.61,119.57 cw(c58.651,120.61) LCD1.18@57.179,120.61 ; LCD1.18@56.57,120.61 57.84,119.34 61.015,119.34 62.285,120.61 LCD2.18@64.19,120.61 ; LCD1.18@56.57,161.64 cw(c56.57,160.169) 57.61,161.21 cw(c58.651,162.25) LCD1.18@57.179,162.25 ; LCD1.18@56.57,162.25 57.84,160.98 61.015,160.98 62.285,162.25 LCD2.18@64.19,162.25 ; LCD2.18@63.759,36.899 ccw(c62.719,35.859) 62.719,37.33 ccw(c62.719,38.801) LCD2.18@63.759,37.761 ; LCD2.18@63.759,78.539 ccw(c62.719,77.499) 62.719,78.97 ccw(c62.719,80.441) LCD2.18@63.759,79.401 ; LCD2.18@63.759,120.179 ccw(c62.719,119.139) 62.719,120.61 ccw(c62.719,122.081) LCD2.18@63.759,121.041 ; LCD2.18@63.759,161.819 ccw(c62.719,160.779) 62.719,162.25 ccw(c62.719,163.721) LCD2.18@63.759,162.681 ; LCD1.18@70.27,36.721 cw(c70.27,35.249) 71.31,36.29 cw(c72.351,37.33) LCD1.18@70.879,37.33 ; LCD1.18@70.27,37.33 71.54,36.06 74.715,36.06 75.985,37.33 LCD2.18@77.89,37.33 ; LCD1.18@70.27,78.36 cw(c70.27,76.889) 71.31,77.93 cw(c72.351,78.97) LCD1.18@70.879,78.97 ; LCD1.18@70.27,78.97 71.54,77.7 74.715,77.7 75.985,78.97 LCD2.18@77.89,78.97 ; LCD1.18@70.27,120 cw(c70.27,118.529) 71.31,119.57 cw(c72.351,120.61) LCD1.18@70.879,120.61 ; LCD1.18@70.27,120.61 71.54,119.34 74.715,119.34 75.985,120.61 LCD2.18@77.89,120.61 ; LCD1.18@70.27,161.64 cw(c70.27,160.169) 71.31,161.21 cw(c72.351,162.25) LCD1.18@70.879,162.25 ; LCD1.18@70.27,162.25 71.54,160.98 74.715,160.98 75.985,162.25 LCD2.18@77.89,162.25 ; LCD2.18@77.459,36.899 ccw(c76.419,35.859) 76.419,37.33 ccw(c76.419,38.801) LCD2.18@77.459,37.761 ; LCD2.18@77.459,78.539 ccw(c76.419,77.499) 76.419,78.97 ccw(c76.419,80.441) LCD2.18@77.459,79.401 ; LCD2.18@77.459,120.179 ccw(c76.419,119.139) 76.419,120.61 ccw(c76.419,122.081) LCD2.18@77.459,121.041 ; LCD2.18@77.459,161.819 ccw(c76.419,160.779) 76.419,162.25 ccw(c76.419,163.721) LCD2.18@77.459,162.681 ; LCD1.18@83.97,36.721 cw(c83.97,35.249) 85.01,36.29 cw(c86.051,37.33) LCD1.18@84.579,37.33 ; LCD1.18@83.97,37.33 85.24,36.06 88.415,36.06 89.685,37.33 LCD2.18@91.59,37.33 ; LCD1.18@83.97,78.36 cw(c83.97,76.889) 85.01,77.93 cw(c86.051,78.97) LCD1.18@84.579,78.97 ; LCD1.18@83.97,78.97 85.24,77.7 88.415,77.7 89.685,78.97 LCD2.18@91.59,78.97 ; LCD1.18@83.97,120 cw(c83.97,118.529) 85.01,119.57 cw(c86.051,120.61) LCD1.18@84.579,120.61 ; LCD1.18@83.97,120.61 85.24,119.34 88.415,119.34 89.685,120.61 LCD2.18@91.59,120.61 ; LCD1.18@83.97,161.64 cw(c83.97,160.169) 85.01,161.21 cw(c86.051,162.25) LCD1.18@84.579,162.25 ; LCD1.18@83.97,162.25 85.24,160.98 88.415,160.98 89.685,162.25 LCD2.18@91.59,162.25 ; LCD2.18@91.159,36.899 ccw(c90.119,35.859) 90.119,37.33 ccw(c90.119,38.801) LCD2.18@91.159,37.761 ; LCD2.18@91.159,78.539 ccw(c90.119,77.499) 90.119,78.97 ccw(c90.119,80.441) LCD2.18@91.159,79.401 ; LCD2.18@91.159,120.179 ccw(c90.119,119.139) 90.119,120.61 ccw(c90.119,122.081) LCD2.18@91.159,121.041 ; LCD2.18@91.159,161.819 ccw(c90.119,160.779) 90.119,162.25 ccw(c90.119,163.721) LCD2.18@91.159,162.681 ; LCD1.18@97.67,36.721 cw(c97.67,35.249) 98.71,36.29 cw(c99.751,37.33) LCD1.18@98.279,37.33 ; LCD1.18@97.67,37.33 98.94,36.06 102.115,36.06 103.385,37.33 LCD2.18@105.29,37.33 ; LCD1.18@97.67,78.36 cw(c97.67,76.889) 98.71,77.93 cw(c99.751,78.97) LCD1.18@98.279,78.97 ; LCD1.18@97.67,78.97 98.94,77.7 102.115,77.7 103.385,78.97 LCD2.18@105.29,78.97 ; LCD1.18@97.67,120 cw(c97.67,118.529) 98.71,119.57 cw(c99.751,120.61) LCD1.18@98.279,120.61 ; LCD1.18@97.67,120.61 98.94,119.34 102.115,119.34 103.385,120.61 LCD2.18@105.29,120.61 ; LCD1.18@97.67,161.64 cw(c97.67,160.169) 98.71,161.21 cw(c99.751,162.25) LCD1.18@98.279,162.25 ; LCD1.18@97.67,162.25 98.94,160.98 102.115,160.98 103.385,162.25 LCD2.18@105.29,162.25 ; LCD2.18@104.859,36.899 ccw(c103.819,35.859) 103.819,37.33 ccw(c103.819,38.801) LCD2.18@104.859,37.761 ; LCD2.18@104.859,78.539 ccw(c103.819,77.499) 103.819,78.97 ccw(c103.819,80.441) LCD2.18@104.859,79.401 ; LCD2.18@104.859,120.179 ccw(c103.819,119.139) 103.819,120.61 ccw(c103.819,122.081) LCD2.18@104.859,121.041 ; LCD2.18@104.859,161.819 ccw(c103.819,160.779) 103.819,162.25 ccw(c103.819,163.721) LCD2.18@104.859,162.681 ; LCD1.18@111.37,36.721 cw(c111.37,35.249) 112.41,36.29 cw(c113.451,37.33) LCD1.18@111.979,37.33 ; LCD1.18@111.37,37.33 112.64,36.06 115.815,36.06 117.085,37.33 LCD2.18@118.99,37.33 ; LCD1.18@111.37,78.36 cw(c111.37,76.889) 112.41,77.93 cw(c113.451,78.97) LCD1.18@111.979,78.97 ; LCD1.18@111.37,78.97 112.64,77.7 115.815,77.7 117.085,78.97 LCD2.18@118.99,78.97 ; LCD1.18@111.37,120 cw(c111.37,118.529) 112.41,119.57 cw(c113.451,120.61) LCD1.18@111.979,120.61 ; LCD1.18@111.37,120.61 112.64,119.34 115.815,119.34 117.085,120.61 LCD2.18@118.99,120.61 ; LCD1.18@111.37,161.64 cw(c111.37,160.169) 112.41,161.21 cw(c113.451,162.25) LCD1.18@111.979,162.25 ; LCD1.18@111.37,162.25 112.64,160.98 115.815,160.98 117.085,162.25 LCD2.18@118.99,162.25 ; LCD2.18@118.559,36.899 ccw(c117.519,35.859) 117.519,37.33 ccw(c117.519,38.801) LCD2.18@118.559,37.761 ; LCD2.18@118.559,78.539 ccw(c117.519,77.499) 117.519,78.97 ccw(c117.519,80.441) LCD2.18@118.559,79.401 ; LCD2.18@118.559,120.179 ccw(c117.519,119.139) 117.519,120.61 ccw(c117.519,122.081) LCD2.18@118.559,121.041 ; LCD2.18@118.559,161.819 ccw(c117.519,160.779) 117.519,162.25 ccw(c117.519,163.721) LCD2.18@118.559,162.681 ; LCD1.18@125.07,36.721 cw(c125.07,35.249) 126.11,36.29 cw(c127.151,37.33) LCD1.18@125.679,37.33 ; LCD1.18@125.07,37.33 126.34,36.06 129.515,36.06 130.785,37.33 LCD2.18@132.69,37.33 ; LCD1.18@125.07,78.36 cw(c125.07,76.889) 126.11,77.93 cw(c127.151,78.97) LCD1.18@125.679,78.97 ; LCD1.18@125.07,78.97 126.34,77.7 129.515,77.7 130.785,78.97 LCD2.18@132.69,78.97 ; LCD1.18@125.07,120 cw(c125.07,118.529) 126.11,119.57 cw(c127.151,120.61) LCD1.18@125.679,120.61 ; LCD1.18@125.07,120.61 126.34,119.34 129.515,119.34 130.785,120.61 LCD2.18@132.69,120.61 ; LCD1.18@125.07,161.64 cw(c125.07,160.169) 126.11,161.21 cw(c127.151,162.25) LCD1.18@125.679,162.25 ; LCD1.18@125.07,162.25 126.34,160.98 129.515,160.98 130.785,162.25 LCD2.18@132.69,162.25 ; LCD2.18@132.259,36.899 ccw(c131.219,35.859) 131.219,37.33 ccw(c131.219,38.801) LCD2.18@132.259,37.761 ; LCD2.18@132.259,78.539 ccw(c131.219,77.499) 131.219,78.97 ccw(c131.219,80.441) LCD2.18@132.259,79.401 ; LCD2.18@132.259,120.179 ccw(c131.219,119.139) 131.219,120.61 ccw(c131.219,122.081) LCD2.18@132.259,121.041 ; LCD2.18@132.259,161.819 ccw(c131.219,160.779) 131.219,162.25 ccw(c131.219,163.721) LCD2.18@132.259,162.681
NetLCD1_19: LCD1.19 LCD2.19 | length 531.8
  Top Layer w0.381: LCD1.19@1.77,34.181 cw(c1.77,32.709) 2.81,33.75 cw(c3.851,34.79) LCD1.19@2.379,34.79 ; LCD1.19@1.77,34.79 3.04,33.52 6.215,33.52 7.485,34.79 LCD2.19@9.39,34.79 ; LCD1.19@1.77,75.82 cw(c1.77,74.349) 2.81,75.39 cw(c3.851,76.43) LCD1.19@2.379,76.43 ; LCD1.19@1.77,76.43 3.04,75.16 6.215,75.16 7.485,76.43 LCD2.19@9.39,76.43 ; LCD1.19@1.77,117.46 cw(c1.77,115.989) 2.81,117.03 cw(c3.851,118.07) LCD1.19@2.379,118.07 ; LCD1.19@1.77,118.07 3.04,116.8 6.215,116.8 7.485,118.07 LCD2.19@9.39,118.07 ; LCD1.19@1.77,159.1 cw(c1.77,157.629) 2.81,158.67 cw(c3.851,159.71) LCD1.19@2.379,159.71 ; LCD1.19@1.77,159.71 3.04,158.44 6.215,158.44 7.485,159.71 LCD2.19@9.39,159.71 ; LCD2.19@8.959,34.359 ccw(c7.919,33.319) 7.919,34.79 ccw(c7.919,36.261) LCD2.19@8.959,35.221 ; LCD2.19@8.959,75.999 ccw(c7.919,74.959) 7.919,76.43 ccw(c7.919,77.901) LCD2.19@8.959,76.861 ; LCD2.19@8.959,117.639 ccw(c7.919,116.599) 7.919,118.07 ccw(c7.919,119.541) LCD2.19@8.959,118.501 ; LCD2.19@8.959,159.279 ccw(c7.919,158.239) 7.919,159.71 ccw(c7.919,161.181) LCD2.19@8.959,160.141 ; LCD1.19@15.47,34.181 cw(c15.47,32.709) 16.51,33.75 cw(c17.551,34.79) LCD1.19@16.079,34.79 ; LCD1.19@15.47,34.79 16.74,33.52 19.915,33.52 21.185,34.79 LCD2.19@23.09,34.79 ; LCD1.19@15.47,75.82 cw(c15.47,74.349) 16.51,75.39 cw(c17.551,76.43) LCD1.19@16.079,76.43 ; LCD1.19@15.47,76.43 16.74,75.16 19.915,75.16 21.185,76.43 LCD2.19@23.09,76.43 ; LCD1.19@15.47,117.46 cw(c15.47,115.989) 16.51,117.03 cw(c17.551,118.07) LCD1.19@16.079,118.07 ; LCD1.19@15.47,118.07 16.74,116.8 19.915,116.8 21.185,118.07 LCD2.19@23.09,118.07 ; LCD1.19@15.47,159.1 cw(c15.47,157.629) 16.51,158.67 cw(c17.551,159.71) LCD1.19@16.079,159.71 ; LCD1.19@15.47,159.71 16.74,158.44 19.915,158.44 21.185,159.71 LCD2.19@23.09,159.71 ; LCD2.19@22.659,34.359 ccw(c21.619,33.319) 21.619,34.79 ccw(c21.619,36.261) LCD2.19@22.659,35.221 ; LCD2.19@22.659,75.999 ccw(c21.619,74.959) 21.619,76.43 ccw(c21.619,77.901) LCD2.19@22.659,76.861 ; LCD2.19@22.659,117.639 ccw(c21.619,116.599) 21.619,118.07 ccw(c21.619,119.541) LCD2.19@22.659,118.501 ; LCD2.19@22.659,159.279 ccw(c21.619,158.239) 21.619,159.71 ccw(c21.619,161.181) LCD2.19@22.659,160.141 ; LCD1.19@29.17,34.181 cw(c29.17,32.709) 30.21,33.75 cw(c31.251,34.79) LCD1.19@29.779,34.79 ; LCD1.19@29.17,34.79 30.44,33.52 33.615,33.52 34.885,34.79 LCD2.19@36.79,34.79 ; LCD1.19@29.17,75.82 cw(c29.17,74.349) 30.21,75.39 cw(c31.251,76.43) LCD1.19@29.779,76.43 ; LCD1.19@29.17,76.43 30.44,75.16 33.615,75.16 34.885,76.43 LCD2.19@36.79,76.43 ; LCD1.19@29.17,117.46 cw(c29.17,115.989) 30.21,117.03 cw(c31.251,118.07) LCD1.19@29.779,118.07 ; LCD1.19@29.17,118.07 30.44,116.8 33.615,116.8 34.885,118.07 LCD2.19@36.79,118.07 ; LCD1.19@29.17,159.1 cw(c29.17,157.629) 30.21,158.67 cw(c31.251,159.71) LCD1.19@29.779,159.71 ; LCD1.19@29.17,159.71 30.44,158.44 33.615,158.44 34.885,159.71 LCD2.19@36.79,159.71 ; LCD2.19@36.359,34.359 ccw(c35.319,33.319) 35.319,34.79 ccw(c35.319,36.261) LCD2.19@36.359,35.221 ; LCD2.19@36.359,75.999 ccw(c35.319,74.959) 35.319,76.43 ccw(c35.319,77.901) LCD2.19@36.359,76.861 ; LCD2.19@36.359,117.639 ccw(c35.319,116.599) 35.319,118.07 ccw(c35.319,119.541) LCD2.19@36.359,118.501 ; LCD2.19@36.359,159.279 ccw(c35.319,158.239) 35.319,159.71 ccw(c35.319,161.181) LCD2.19@36.359,160.141 ; LCD1.19@42.87,34.181 cw(c42.87,32.709) 43.91,33.75 cw(c44.951,34.79) LCD1.19@43.479,34.79 ; LCD1.19@42.87,34.79 44.14,33.52 47.315,33.52 48.585,34.79 LCD2.19@50.49,34.79 ; LCD1.19@42.87,75.82 cw(c42.87,74.349) 43.91,75.39 cw(c44.951,76.43) LCD1.19@43.479,76.43 ; LCD1.19@42.87,76.43 44.14,75.16 47.315,75.16 48.585,76.43 LCD2.19@50.49,76.43 ; LCD1.19@42.87,117.46 cw(c42.87,115.989) 43.91,117.03 cw(c44.951,118.07) LCD1.19@43.479,118.07 ; LCD1.19@42.87,118.07 44.14,116.8 47.315,116.8 48.585,118.07 LCD2.19@50.49,118.07 ; LCD1.19@42.87,159.1 cw(c42.87,157.629) 43.91,158.67 cw(c44.951,159.71) LCD1.19@43.479,159.71 ; LCD1.19@42.87,159.71 44.14,158.44 47.315,158.44 48.585,159.71 LCD2.19@50.49,159.71 ; LCD2.19@50.059,34.359 ccw(c49.019,33.319) 49.019,34.79 ccw(c49.019,36.261) LCD2.19@50.059,35.221 ; LCD2.19@50.059,75.999 ccw(c49.019,74.959) 49.019,76.43 ccw(c49.019,77.901) LCD2.19@50.059,76.861 ; LCD2.19@50.059,117.639 ccw(c49.019,116.599) 49.019,118.07 ccw(c49.019,119.541) LCD2.19@50.059,118.501 ; LCD2.19@50.059,159.279 ccw(c49.019,158.239) 49.019,159.71 ccw(c49.019,161.181) LCD2.19@50.059,160.141 ; LCD1.19@56.57,34.181 cw(c56.57,32.709) 57.61,33.75 cw(c58.651,34.79) LCD1.19@57.179,34.79 ; LCD1.19@56.57,34.79 57.84,33.52 61.015,33.52 62.285,34.79 LCD2.19@64.19,34.79 ; LCD1.19@56.57,75.82 cw(c56.57,74.349) 57.61,75.39 cw(c58.651,76.43) LCD1.19@57.179,76.43 ; LCD1.19@56.57,76.43 57.84,75.16 61.015,75.16 62.285,76.43 LCD2.19@64.19,76.43 ; LCD1.19@56.57,117.46 cw(c56.57,115.989) 57.61,117.03 cw(c58.651,118.07) LCD1.19@57.179,118.07 ; LCD1.19@56.57,118.07 57.84,116.8 61.015,116.8 62.285,118.07 LCD2.19@64.19,118.07 ; LCD1.19@56.57,159.1 cw(c56.57,157.629) 57.61,158.67 cw(c58.651,159.71) LCD1.19@57.179,159.71 ; LCD1.19@56.57,159.71 57.84,158.44 61.015,158.44 62.285,159.71 LCD2.19@64.19,159.71 ; LCD2.19@63.759,34.359 ccw(c62.719,33.319) 62.719,34.79 ccw(c62.719,36.261) LCD2.19@63.759,35.221 ; LCD2.19@63.759,75.999 ccw(c62.719,74.959) 62.719,76.43 ccw(c62.719,77.901) LCD2.19@63.759,76.861 ; LCD2.19@63.759,117.639 ccw(c62.719,116.599) 62.719,118.07 ccw(c62.719,119.541) LCD2.19@63.759,118.501 ; LCD2.19@63.759,159.279 ccw(c62.719,158.239) 62.719,159.71 ccw(c62.719,161.181) LCD2.19@63.759,160.141 ; LCD1.19@70.27,34.181 cw(c70.27,32.709) 71.31,33.75 cw(c72.351,34.79) LCD1.19@70.879,34.79 ; LCD1.19@70.27,34.79 71.54,33.52 74.715,33.52 75.985,34.79 LCD2.19@77.89,34.79 ; LCD1.19@70.27,75.82 cw(c70.27,74.349) 71.31,75.39 cw(c72.351,76.43) LCD1.19@70.879,76.43 ; LCD1.19@70.27,76.43 71.54,75.16 74.715,75.16 75.985,76.43 LCD2.19@77.89,76.43 ; LCD1.19@70.27,117.46 cw(c70.27,115.989) 71.31,117.03 cw(c72.351,118.07) LCD1.19@70.879,118.07 ; LCD1.19@70.27,118.07 71.54,116.8 74.715,116.8 75.985,118.07 LCD2.19@77.89,118.07 ; LCD1.19@70.27,159.1 cw(c70.27,157.629) 71.31,158.67 cw(c72.351,159.71) LCD1.19@70.879,159.71 ; LCD1.19@70.27,159.71 71.54,158.44 74.715,158.44 75.985,159.71 LCD2.19@77.89,159.71 ; LCD2.19@77.459,34.359 ccw(c76.419,33.319) 76.419,34.79 ccw(c76.419,36.261) LCD2.19@77.459,35.221 ; LCD2.19@77.459,75.999 ccw(c76.419,74.959) 76.419,76.43 ccw(c76.419,77.901) LCD2.19@77.459,76.861 ; LCD2.19@77.459,117.639 ccw(c76.419,116.599) 76.419,118.07 ccw(c76.419,119.541) LCD2.19@77.459,118.501 ; LCD2.19@77.459,159.279 ccw(c76.419,158.239) 76.419,159.71 ccw(c76.419,161.181) LCD2.19@77.459,160.141 ; LCD1.19@83.97,34.181 cw(c83.97,32.709) 85.01,33.75 cw(c86.051,34.79) LCD1.19@84.579,34.79 ; LCD1.19@83.97,34.79 85.24,33.52 88.415,33.52 89.685,34.79 LCD2.19@91.59,34.79 ; LCD1.19@83.97,75.82 cw(c83.97,74.349) 85.01,75.39 cw(c86.051,76.43) LCD1.19@84.579,76.43 ; LCD1.19@83.97,76.43 85.24,75.16 88.415,75.16 89.685,76.43 LCD2.19@91.59,76.43 ; LCD1.19@83.97,117.46 cw(c83.97,115.989) 85.01,117.03 cw(c86.051,118.07) LCD1.19@84.579,118.07 ; LCD1.19@83.97,118.07 85.24,116.8 88.415,116.8 89.685,118.07 LCD2.19@91.59,118.07 ; LCD1.19@83.97,159.1 cw(c83.97,157.629) 85.01,158.67 cw(c86.051,159.71) LCD1.19@84.579,159.71 ; LCD1.19@83.97,159.71 85.24,158.44 88.415,158.44 89.685,159.71 LCD2.19@91.59,159.71 ; LCD2.19@91.159,34.359 ccw(c90.119,33.319) 90.119,34.79 ccw(c90.119,36.261) LCD2.19@91.159,35.221 ; LCD2.19@91.159,75.999 ccw(c90.119,74.959) 90.119,76.43 ccw(c90.119,77.901) LCD2.19@91.159,76.861 ; LCD2.19@91.159,117.639 ccw(c90.119,116.599) 90.119,118.07 ccw(c90.119,119.541) LCD2.19@91.159,118.501 ; LCD2.19@91.159,159.279 ccw(c90.119,158.239) 90.119,159.71 ccw(c90.119,161.181) LCD2.19@91.159,160.141 ; LCD1.19@97.67,34.181 cw(c97.67,32.709) 98.71,33.75 cw(c99.751,34.79) LCD1.19@98.279,34.79 ; LCD1.19@97.67,34.79 98.94,33.52 102.115,33.52 103.385,34.79 LCD2.19@105.29,34.79 ; LCD1.19@97.67,75.82 cw(c97.67,74.349) 98.71,75.39 cw(c99.751,76.43) LCD1.19@98.279,76.43 ; LCD1.19@97.67,76.43 98.94,75.16 102.115,75.16 103.385,76.43 LCD2.19@105.29,76.43 ; LCD1.19@97.67,117.46 cw(c97.67,115.989) 98.71,117.03 cw(c99.751,118.07) LCD1.19@98.279,118.07 ; LCD1.19@97.67,118.07 98.94,116.8 102.115,116.8 103.385,118.07 LCD2.19@105.29,118.07 ; LCD1.19@97.67,159.1 cw(c97.67,157.629) 98.71,158.67 cw(c99.751,159.71) LCD1.19@98.279,159.71 ; LCD1.19@97.67,159.71 98.94,158.44 102.115,158.44 103.385,159.71 LCD2.19@105.29,159.71 ; LCD2.19@104.859,34.359 ccw(c103.819,33.319) 103.819,34.79 ccw(c103.819,36.261) LCD2.19@104.859,35.221 ; LCD2.19@104.859,75.999 ccw(c103.819,74.959) 103.819,76.43 ccw(c103.819,77.901) LCD2.19@104.859,76.861 ; LCD2.19@104.859,117.639 ccw(c103.819,116.599) 103.819,118.07 ccw(c103.819,119.541) LCD2.19@104.859,118.501 ; LCD2.19@104.859,159.279 ccw(c103.819,158.239) 103.819,159.71 ccw(c103.819,161.181) LCD2.19@104.859,160.141 ; LCD1.19@111.37,34.181 cw(c111.37,32.709) 112.41,33.75 cw(c113.451,34.79) LCD1.19@111.979,34.79 ; LCD1.19@111.37,34.79 112.64,33.52 115.815,33.52 117.085,34.79 LCD2.19@118.99,34.79 ; LCD1.19@111.37,75.82 cw(c111.37,74.349) 112.41,75.39 cw(c113.451,76.43) LCD1.19@111.979,76.43 ; LCD1.19@111.37,76.43 112.64,75.16 115.815,75.16 117.085,76.43 LCD2.19@118.99,76.43 ; LCD1.19@111.37,117.46 cw(c111.37,115.989) 112.41,117.03 cw(c113.451,118.07) LCD1.19@111.979,118.07 ; LCD1.19@111.37,118.07 112.64,116.8 115.815,116.8 117.085,118.07 LCD2.19@118.99,118.07 ; LCD1.19@111.37,159.1 cw(c111.37,157.629) 112.41,158.67 cw(c113.451,159.71) LCD1.19@111.979,159.71 ; LCD1.19@111.37,159.71 112.64,158.44 115.815,158.44 117.085,159.71 LCD2.19@118.99,159.71 ; LCD2.19@118.559,34.359 ccw(c117.519,33.319) 117.519,34.79 ccw(c117.519,36.261) LCD2.19@118.559,35.221 ; LCD2.19@118.559,75.999 ccw(c117.519,74.959) 117.519,76.43 ccw(c117.519,77.901) LCD2.19@118.559,76.861 ; LCD2.19@118.559,117.639 ccw(c117.519,116.599) 117.519,118.07 ccw(c117.519,119.541) LCD2.19@118.559,118.501 ; LCD2.19@118.559,159.279 ccw(c117.519,158.239) 117.519,159.71 ccw(c117.519,161.181) LCD2.19@118.559,160.141 ; LCD1.19@125.07,34.181 cw(c125.07,32.709) 126.11,33.75 cw(c127.151,34.79) LCD1.19@125.679,34.79 ; LCD1.19@125.07,34.79 126.34,33.52 129.515,33.52 130.785,34.79 LCD2.19@132.69,34.79 ; LCD1.19@125.07,75.82 cw(c125.07,74.349) 126.11,75.39 cw(c127.151,76.43) LCD1.19@125.679,76.43 ; LCD1.19@125.07,76.43 126.34,75.16 129.515,75.16 130.785,76.43 LCD2.19@132.69,76.43 ; LCD1.19@125.07,117.46 cw(c125.07,115.989) 126.11,117.03 cw(c127.151,118.07) LCD1.19@125.679,118.07 ; LCD1.19@125.07,118.07 126.34,116.8 129.515,116.8 130.785,118.07 LCD2.19@132.69,118.07 ; LCD1.19@125.07,159.1 cw(c125.07,157.629) 126.11,158.67 cw(c127.151,159.71) LCD1.19@125.679,159.71 ; LCD1.19@125.07,159.71 126.34,158.44 129.515,158.44 130.785,159.71 LCD2.19@132.69,159.71 ; LCD2.19@132.259,34.359 ccw(c131.219,33.319) 131.219,34.79 ccw(c131.219,36.261) LCD2.19@132.259,35.221 ; LCD2.19@132.259,75.999 ccw(c131.219,74.959) 131.219,76.43 ccw(c131.219,77.901) LCD2.19@132.259,76.861 ; LCD2.19@132.259,117.639 ccw(c131.219,116.599) 131.219,118.07 ccw(c131.219,119.541) LCD2.19@132.259,118.501 ; LCD2.19@132.259,159.279 ccw(c131.219,158.239) 131.219,159.71 ccw(c131.219,161.181) LCD2.19@132.259,160.141